# Altium PCB PCB_LEDS.PcbDoc
Units mm, origin at the board's own origin, x right, y up, seen from the top; angles counter-clockwise.
Board outline 250.32 x 170.27 mm, 2 copper layers (Top Layer, Bottom Layer); 85 components, 5 nets, 174 pads, 0 vias.
Unrouted connection lines stored in the file: 5.
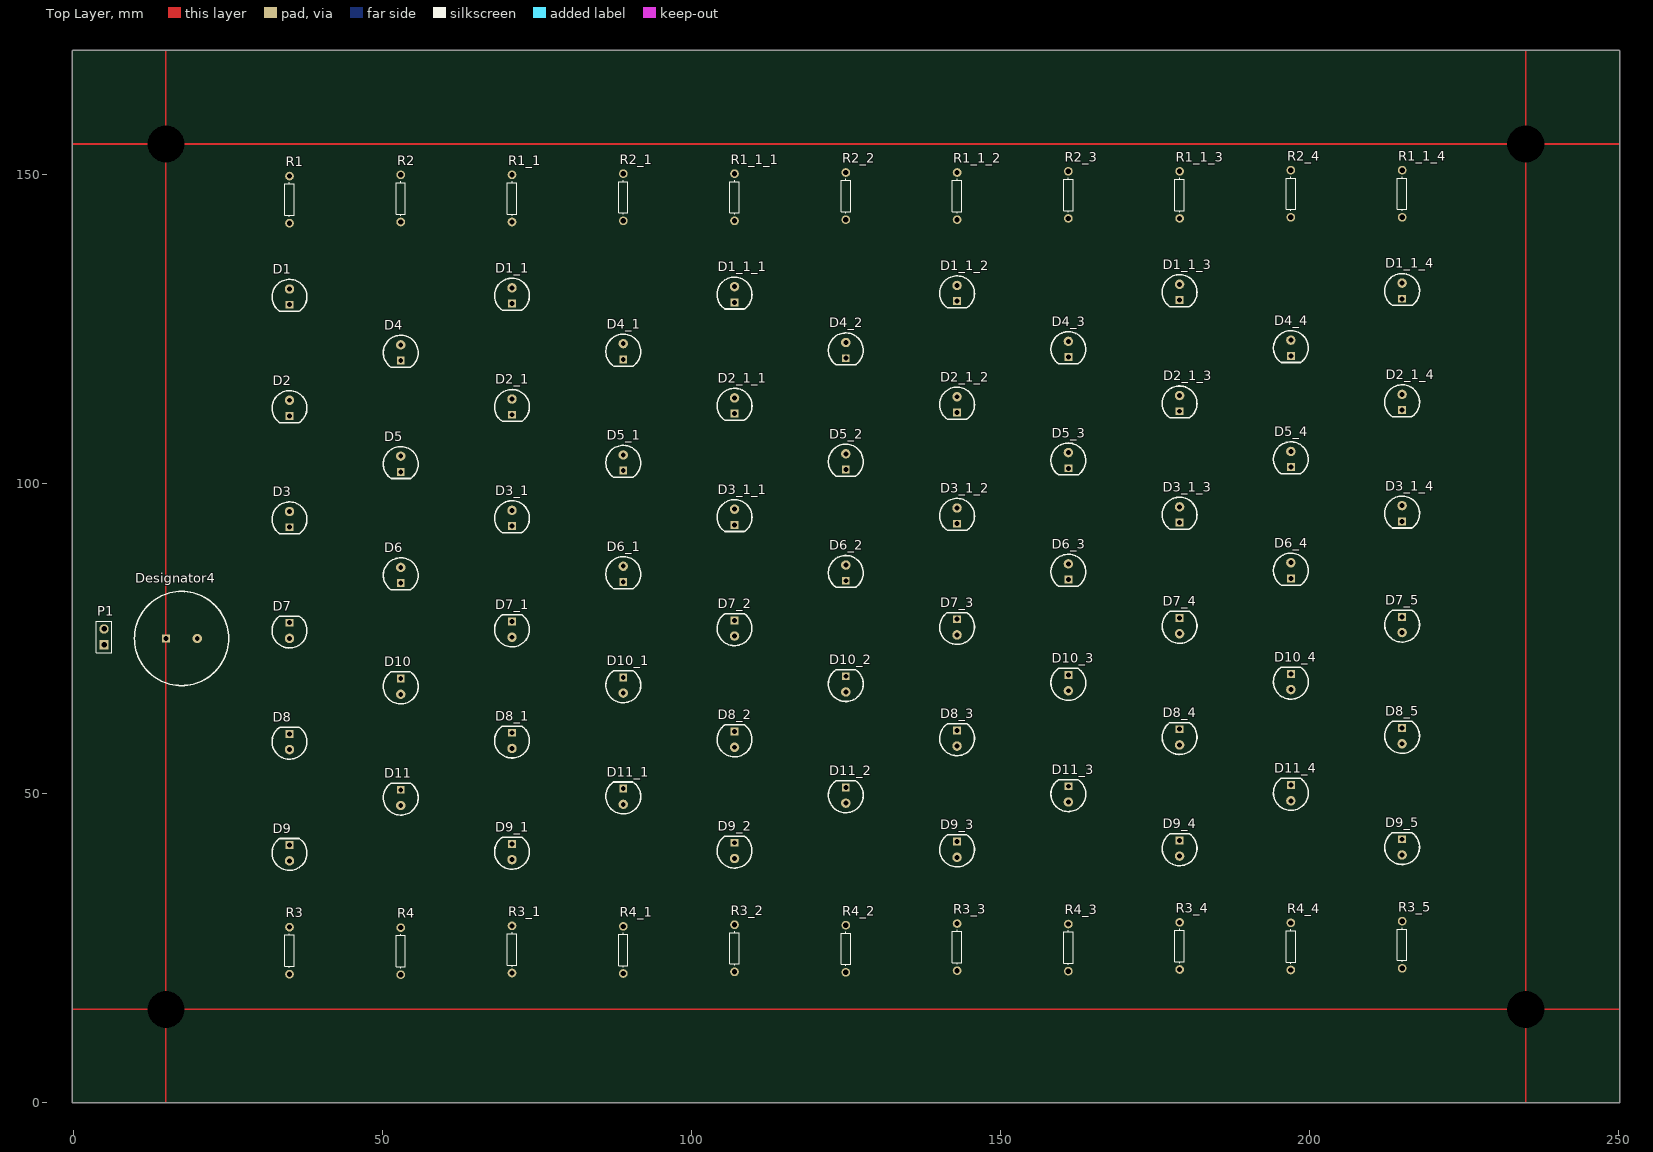
[diagram p0: Top Layer view]
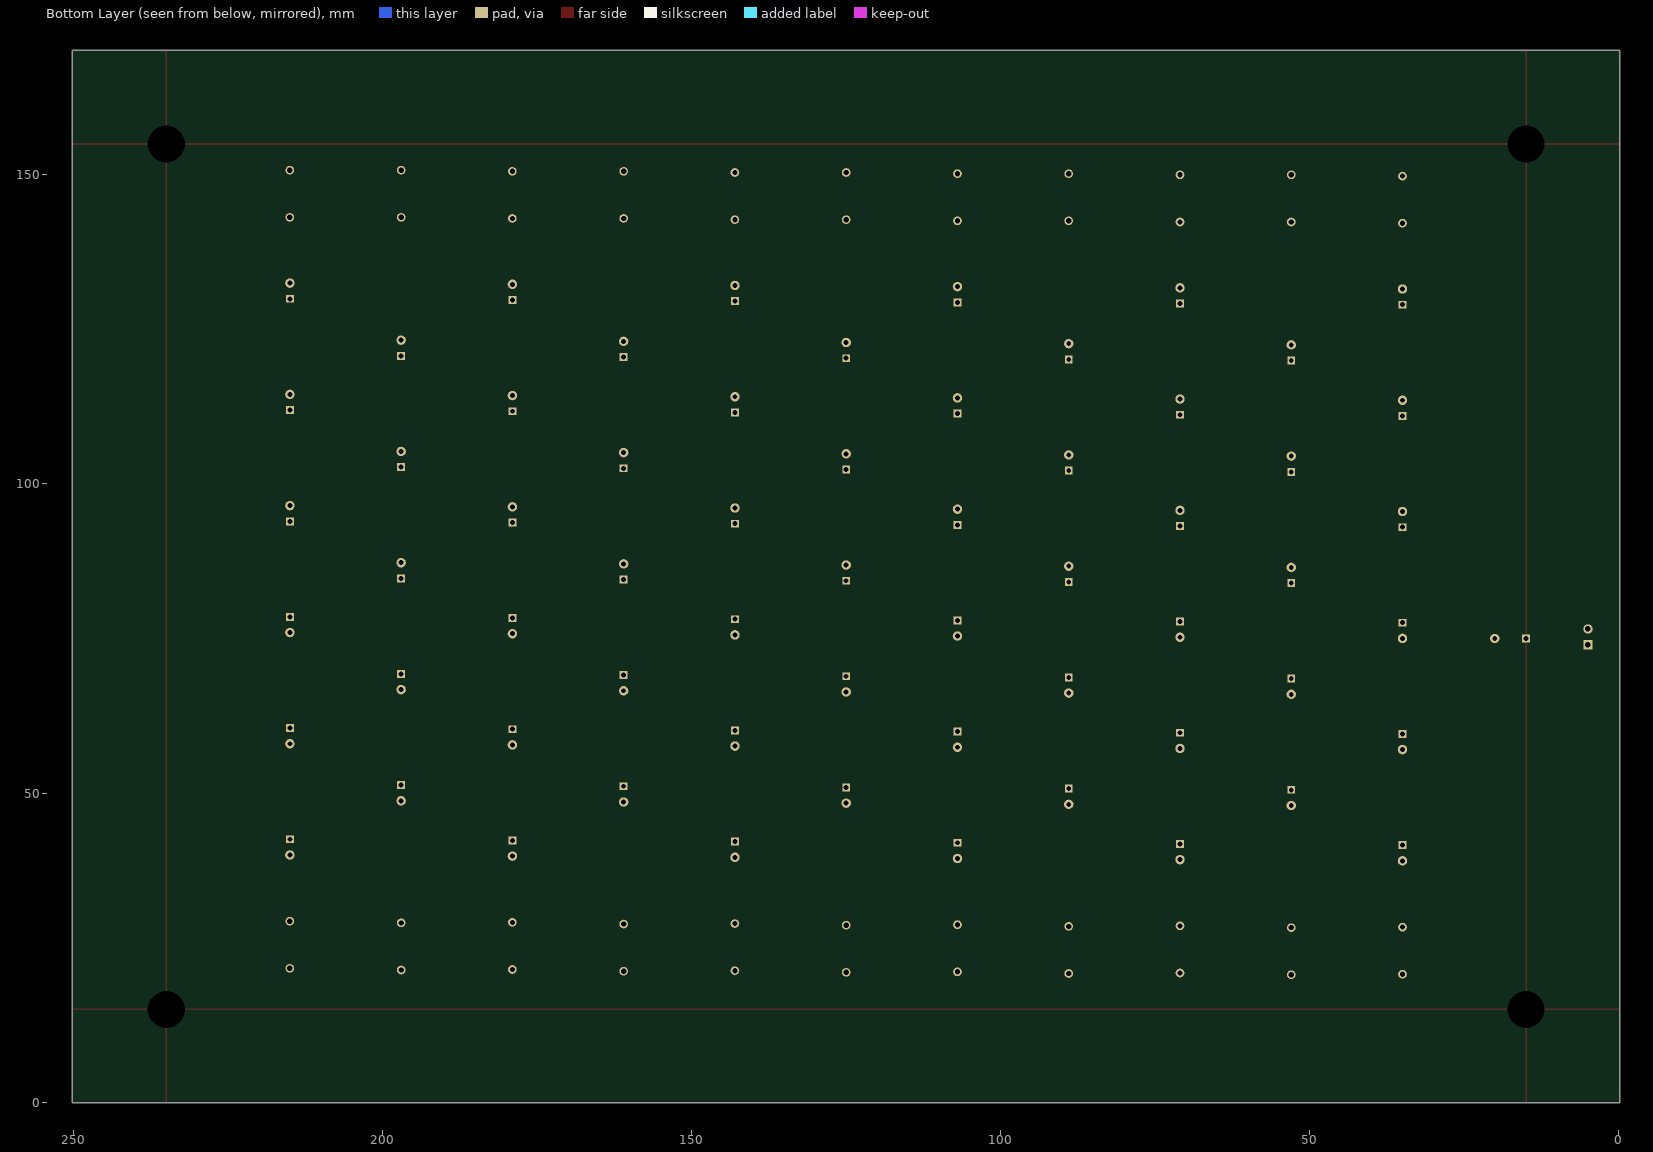
[diagram p1: Bottom Layer view, seen from below]

## Layer stack, top to bottom
Top Solder: solder mask 0.0102, Solder Resist, Dk 3.5
Top Layer: signal copper 0.0356
Dielectric 1: dielectric 0.32, FR-4, Dk 4.8
Bottom Layer: signal copper 0.0356
Bottom Solder: solder mask 0.0102, Solder Resist, Dk 3.5

## Board outline
-0.127,0 ccw(c0,0) 0,-0.127 250,-0.127 ccw(c250,0) 250.031,-0.123 250.032,-0.123 ccw(c250.063,0) 250.19,0 250.19,170.018 ccw(c250.063,170.018) 250.063,170.145 0,170.145 ccw(c0,170.018) -0.127,170.018

## Design rules (kind name [scope] priority, off if disabled: settings)
Clearance [All] p1: gap=0.254
PolygonConnect [All] p1: connectstyle=Relief reliefconductorwidth=0.254 reliefentries=4 polygonreliefangle="90 Angle" airgapwidth=0.254
RoutingVias [All] p1: holewidth=0.711 width=1.27 viastyle="Through Hole" minholewidth=0.711 minwidth=1.27 maxholewidth=0.711 maxwidth=1.27
SolderMaskExpansion [All] p1: expansion=0.102
Width [All] p1: maxlimit=0.254 minlimit=0.254 preferedwidth=0.254
30 further rules are at their usual default settings.

## Classes and differential pairs
component class LEDS_BOARD: D1 D2 D3 D5 P1 R1

## Components (designator, comment, footprint, x,y, rotation, side; value= is the part's Value field where it differs from the comment)
D1 "LED diode" led_UV 35,129 r90 top
D1_1 "LED diode" led_UV 71,129.19 r90 top (schematic designator D1)
D1_1_1 "LED diode" led_UV 107,129.38 r90 top (schematic designator D1)
D1_1_2 "LED diode" led_UV 143,129.57 r90 top (schematic designator D1)
D1_1_3 "LED diode" led_UV 179,129.76 r90 top (schematic designator D1)
D1_1_4 "LED diode" led_UV 215,129.95 r90 top (schematic designator D1)
D2 "LED diode" led_UV 35,111 r90 top
D2_1 "LED diode" led_UV 71,111.19 r90 top (schematic designator D2)
D2_1_1 "LED diode" led_UV 107,111.38 r90 top (schematic designator D2)
D2_1_2 "LED diode" led_UV 143,111.57 r90 top (schematic designator D2)
D2_1_3 "LED diode" led_UV 179,111.76 r90 top (schematic designator D2)
D2_1_4 "LED diode" led_UV 215,111.95 r90 top (schematic designator D2)
D3 "LED diode" led_UV 35,93 r90 top
D3_1 "LED diode" led_UV 71,93.19 r90 top (schematic designator D3)
D3_1_1 "LED diode" led_UV 107,93.38 r90 top (schematic designator D3)
D3_1_2 "LED diode" led_UV 143,93.57 r90 top (schematic designator D3)
D3_1_3 "LED diode" led_UV 179,93.76 r90 top (schematic designator D3)
D3_1_4 "LED diode" led_UV 215,93.95 r90 top (schematic designator D3)
D4 "LED diode" led_UV 53,119.96 r90 top (schematic designator D1)
D4_1 "LED diode" led_UV 89,120.15 r90 top (schematic designator D1)
D4_2 "LED diode" led_UV 125,120.34 r90 top (schematic designator D1)
D4_3 "LED diode" led_UV 161,120.53 r90 top (schematic designator D1)
D4_4 "LED diode" led_UV 197,120.72 r90 top (schematic designator D1)
D5 "LED diode" led_UV 53,101.96 r90 top (schematic designator D2)
D5_1 "LED diode" led_UV 89,102.15 r90 top (schematic designator D2)
D5_2 "LED diode" led_UV 125,102.34 r90 top (schematic designator D2)
D5_3 "LED diode" led_UV 161,102.53 r90 top (schematic designator D2)
D5_4 "LED diode" led_UV 197,102.72 r90 top (schematic designator D2)
D6 "LED diode" led_UV 53,83.96 r90 top (schematic designator D3)
D6_1 "LED diode" led_UV 89,84.15 r90 top (schematic designator D3)
D6_2 "LED diode" led_UV 125,84.34 r90 top (schematic designator D3)
D6_3 "LED diode" led_UV 161,84.53 r90 top (schematic designator D3)
D6_4 "LED diode" led_UV 197,84.72 r90 top (schematic designator D3)
D7 "LED diode" led_UV 35,77.55 r270 top (schematic designator D3)
D7_1 "LED diode" led_UV 71,77.74 r270 top (schematic designator D3)
D7_2 "LED diode" led_UV 107,77.93 r270 top (schematic designator D3)
D7_3 "LED diode" led_UV 143,78.12 r270 top (schematic designator D3)
D7_4 "LED diode" led_UV 179,78.31 r270 top (schematic designator D3)
D7_5 "LED diode" led_UV 215,78.5 r270 top (schematic designator D3)
D8 "LED diode" led_UV 35,59.56 r270 top (schematic designator D3)
D8_1 "LED diode" led_UV 71,59.75 r270 top (schematic designator D3)
D8_2 "LED diode" led_UV 107,59.94 r270 top (schematic designator D3)
D8_3 "LED diode" led_UV 143,60.13 r270 top (schematic designator D3)
D8_4 "LED diode" led_UV 179,60.32 r270 top (schematic designator D3)
D8_5 "LED diode" led_UV 215,60.51 r270 top (schematic designator D3)
D9 "LED diode" led_UV 35,41.57 r270 top (schematic designator D3)
D9_1 "LED diode" led_UV 71,41.76 r270 top (schematic designator D3)
D9_2 "LED diode" led_UV 107,41.95 r270 top (schematic designator D3)
D9_3 "LED diode" led_UV 143,42.14 r270 top (schematic designator D3)
D9_4 "LED diode" led_UV 179,42.33 r270 top (schematic designator D3)
D9_5 "LED diode" led_UV 215,42.52 r270 top (schematic designator D3)
D10 "LED diode" led_UV 53,68.51 r270 top (schematic designator D3)
D10_1 "LED diode" led_UV 89,68.7 r270 top (schematic designator D3)
D10_2 "LED diode" led_UV 125,68.89 r270 top (schematic designator D3)
D10_3 "LED diode" led_UV 161,69.08 r270 top (schematic designator D3)
D10_4 "LED diode" led_UV 197,69.27 r270 top (schematic designator D3)
D11 "LED diode" led_UV 53,50.52 r270 top (schematic designator D3)
D11_1 "LED diode" led_UV 89,50.71 r270 top (schematic designator D3)
D11_2 "LED diode" led_UV 125,50.9 r270 top (schematic designator D3)
D11_3 "LED diode" led_UV 161,51.09 r270 top (schematic designator D3)
D11_4 "LED diode" led_UV 197,51.28 r270 top (schematic designator D3)
Designator4 "Comment" CAPACITOR_ELECTROLITIC 15,75 r0 top
P1 "Header 2" HDR1X2 5,74 r90 top
R1 "Res1" AXIAL-0.3 35,146 r90 top
R1_1 "Res1" AXIAL-0.3 71,146.19 r90 top (schematic designator R1)
R1_1_1 "Res1" AXIAL-0.3 107,146.38 r90 top (schematic designator R1)
R1_1_2 "Res1" AXIAL-0.3 143,146.57 r90 top (schematic designator R1)
R1_1_3 "Res1" AXIAL-0.3 179,146.76 r90 top (schematic designator R1)
R1_1_4 "Res1" AXIAL-0.3 215,146.95 r90 top (schematic designator R1)
R2 "Res1" AXIAL-0.3 53,146.19 r90 top (schematic designator R1)
R2_1 "Res1" AXIAL-0.3 89,146.38 r90 top (schematic designator R1)
R2_2 "Res1" AXIAL-0.3 125,146.57 r90 top (schematic designator R1)
R2_3 "Res1" AXIAL-0.3 161,146.76 r90 top (schematic designator R1)
R2_4 "Res1" AXIAL-0.3 197,146.95 r90 top (schematic designator R1)
R3 "Res1" AXIAL-0.3 35,24.5 r90 top (schematic designator R1)
R3_1 "Res1" AXIAL-0.3 71,24.69 r90 top (schematic designator R1)
R3_2 "Res1" AXIAL-0.3 107,24.88 r90 top (schematic designator R1)
R3_3 "Res1" AXIAL-0.3 143,25.07 r90 top (schematic designator R1)
R3_4 "Res1" AXIAL-0.3 179,25.26 r90 top (schematic designator R1)
R3_5 "Res1" AXIAL-0.3 215,25.45 r90 top (schematic designator R1)
R4 "Res1" AXIAL-0.3 53,24.42 r90 top (schematic designator R1)
R4_1 "Res1" AXIAL-0.3 89,24.61 r90 top (schematic designator R1)
R4_2 "Res1" AXIAL-0.3 125,24.8 r90 top (schematic designator R1)
R4_3 "Res1" AXIAL-0.3 161,24.99 r90 top (schematic designator R1)
R4_4 "Res1" AXIAL-0.3 197,25.18 r90 top (schematic designator R1)

## Footprints (in the part's own frame and the unit in brackets; to place one, negate y for a bottom-side part, rotate by r counter-clockwise, add the part's x,y. Pads: shape width x height; smd on the part's side, far side on the other; paste and mask are expansions set on the pad)
AXIAL-0.3 [mm] "Axial Device, Thru-Hole; 2 Leads; 0.3 in Pin Spacing"
  round 1.4 hole 0.85: 1(-3.81,0) 2(3.81,0)
  silkscreen extent -2.77,-0.76 2.77,0.76
CAPACITOR_ELECTROLITIC [mil]
  rect 50x50 hole 31.5: 0(0,0)
  round 60 hole 31.5: 1(200,0)
  silkscreen extent -200,-300 400,300, body extent -97,-197 297,197, height 592
HDR1X2 [mm] "Connector; Header; 2 Position"
  rect 1.5x1.5 hole 0.9: 1(0,0)
  round 1.5 hole 0.9: 2(2.54,0)
  silkscreen extent -1.27,-1.27 3.81,1.27
led_UV [mil]
  rect 50x50 hole 31.5: 0(0,0)
  round 60 hole 31.5: 1(100,0)
  silkscreen extent -42,-111 161,111, body extent -28,-59 128,79, height 287

## Part data
D1 D1_1 D1_1_1 D1_1_2 D1_1_3 D1_1_4 D2 D2_1 D2_1_1 D2_1_2 D2_1_3 D2_1_4 D3 D3_1 D3_1_1 D3_1_2 D3_1_3 D3_1_4 D4 D4_1 D4_2 D4_3 D4_4 D5 D5_1 D5_2 D5_3 D5_4 D6 D6_1 D6_2 D6_3 D6_4 D7 D7_1 D7_2 D7_3 D7_4 D7_5 D8 D8_1 D8_2 D8_3 D8_4 D8_5 D9 D9_1 D9_2 D9_3 D9_4 D9_5 D10 D10_1 D10_2 D10_3 D10_4 D11 D11_1 D11_2 D11_3 D11_4: library part LED_UV, "standar through hole led diode"
P1: "Header, 2-Pin"
R1 R1_1 R1_1_1 R1_1_2 R1_1_3 R1_1_4 R2 R2_1 R2_2 R2_3 R2_4 R3 R3_1 R3_2 R3_3 R3_4 R3_5 R4 R4_1 R4_2 R4_3 R4_4: "Resistor"

## Free pads (board coordinates)
  round 0 hole 6: 0(15,155) 1(15,15) 3(235,15) 4(235,155)

## Nets (pads, with @x,y where several pads share a name; then routed paths per layer and width w, separated by ;. In a path a pad name is that pad's centre, name@x,y a point inside that pad or via, vN(x,y) a via of type N, cw(c..) or ccw(c..) an arc to the next point about the centre after c; other vN are vias at no path point)
GND: D3.0 P1.1
NetD1_0: D1.0 D2.1
NetD1_1: D1.1 R1.1
NetD2_0: D2.0 D3.1
VCC: P1.2 R1.2
pads on no net: D1_1.0 D1_1.1 D1_1_1.0 D1_1_1.1 D1_1_2.0 D1_1_2.1 D1_1_3.0 D1_1_3.1 D1_1_4.0 D1_1_4.1 D2_1.0 D2_1.1 D2_1_1.0 D2_1_1.1 D2_1_2.0 D2_1_2.1 D2_1_3.0 D2_1_3.1 D2_1_4.0 D2_1_4.1 D3_1.0 D3_1.1 D3_1_1.0 D3_1_1.1 D3_1_2.0 D3_1_2.1 D3_1_3.0 D3_1_3.1 D3_1_4.0 D3_1_4.1 D4.0 D4.1 D4_1.0 D4_1.1 D4_2.0 D4_2.1 D4_3.0 D4_3.1 D4_4.0 D4_4.1 D5.0 D5.1 D5_1.0 D5_1.1 D5_2.0 D5_2.1 D5_3.0 D5_3.1 D5_4.0 D5_4.1 D6.0 D6.1 D6_1.0 D6_1.1 D6_2.0 D6_2.1 D6_3.0 D6_3.1 D6_4.0 D6_4.1 D7.0 D7.1 D7_1.0 D7_1.1 D7_2.0 D7_2.1 D7_3.0 D7_3.1 D7_4.0 D7_4.1 D7_5.0 D7_5.1 D8.0 D8.1 D8_1.0 D8_1.1 D8_2.0 D8_2.1 D8_3.0 D8_3.1 D8_4.0 D8_4.1 D8_5.0 D8_5.1 D9.0 D9.1 D9_1.0 D9_1.1 D9_2.0 D9_2.1 D9_3.0 D9_3.1 D9_4.0 D9_4.1 D9_5.0 D9_5.1 D10.0 D10.1 D10_1.0 D10_1.1 D10_2.0 D10_2.1 D10_3.0 D10_3.1 D10_4.0 D10_4.1 D11.0 D11.1 D11_1.0 D11_1.1 D11_2.0 D11_2.1 D11_3.0 D11_3.1 D11_4.0 D11_4.1 Designator4.0 Designator4.1 R1_1.1 R1_1.2 R1_1_1.1 R1_1_1.2 R1_1_2.1 R1_1_2.2 R1_1_3.1 R1_1_3.2 R1_1_4.1 R1_1_4.2 R2.1 R2.2 R2_1.1 R2_1.2 R2_2.1 R2_2.2 R2_3.1 R2_3.2 R2_4.1 R2_4.2 R3.1 R3.2 R3_1.1 R3_1.2 R3_2.1 R3_2.2 R3_3.1 R3_3.2 R3_4.1 R3_4.2 R3_5.1 R3_5.2 R4.1 R4.2 R4_1.1 R4_1.2 R4_2.1 R4_2.2 R4_3.1 R4_3.2 R4_4.1 R4_4.2
copper on no net: | length 840.1
  Top Layer w0.254: 0,15 250.063,15 ; 0,155 250.063,155 ; 15,0 15,170 ; 235,0 235,170

## Silkscreen, mask and mechanical layers (free items; w line width, h text height)
Mechanical 1:
  lines w0.254: 250,0 0,0 0,170.018 250.063,170.018 250.063,0

## Dimensions
0,0 to 250.063,0 on Mechanical 1
250.063,0 to 250.063,170.018 on Mechanical 1
35,131.54 to 35,113.54 on Mechanical 1
35,113.54 to 35,95.54 on Mechanical 1
35,131.54 to 0,170.018 on Mechanical 1
35,129 to 0,170.018 on Mechanical 1
35,129 to 53,122.5 on Mechanical 1
53,150 to 71,150 on Mechanical 1
35,149.81 to 53,150 on Mechanical 1
35,93 to 35,75.01 on Mechanical 1
35,142.19 to 35,131.54 on Mechanical 1
35,39.03 to 35,28.31 on Mechanical 1
15,155 to 0,170.018 on Mechanical 1